# EAGLE board Controller Rev 2 (EAGLE 6.1)
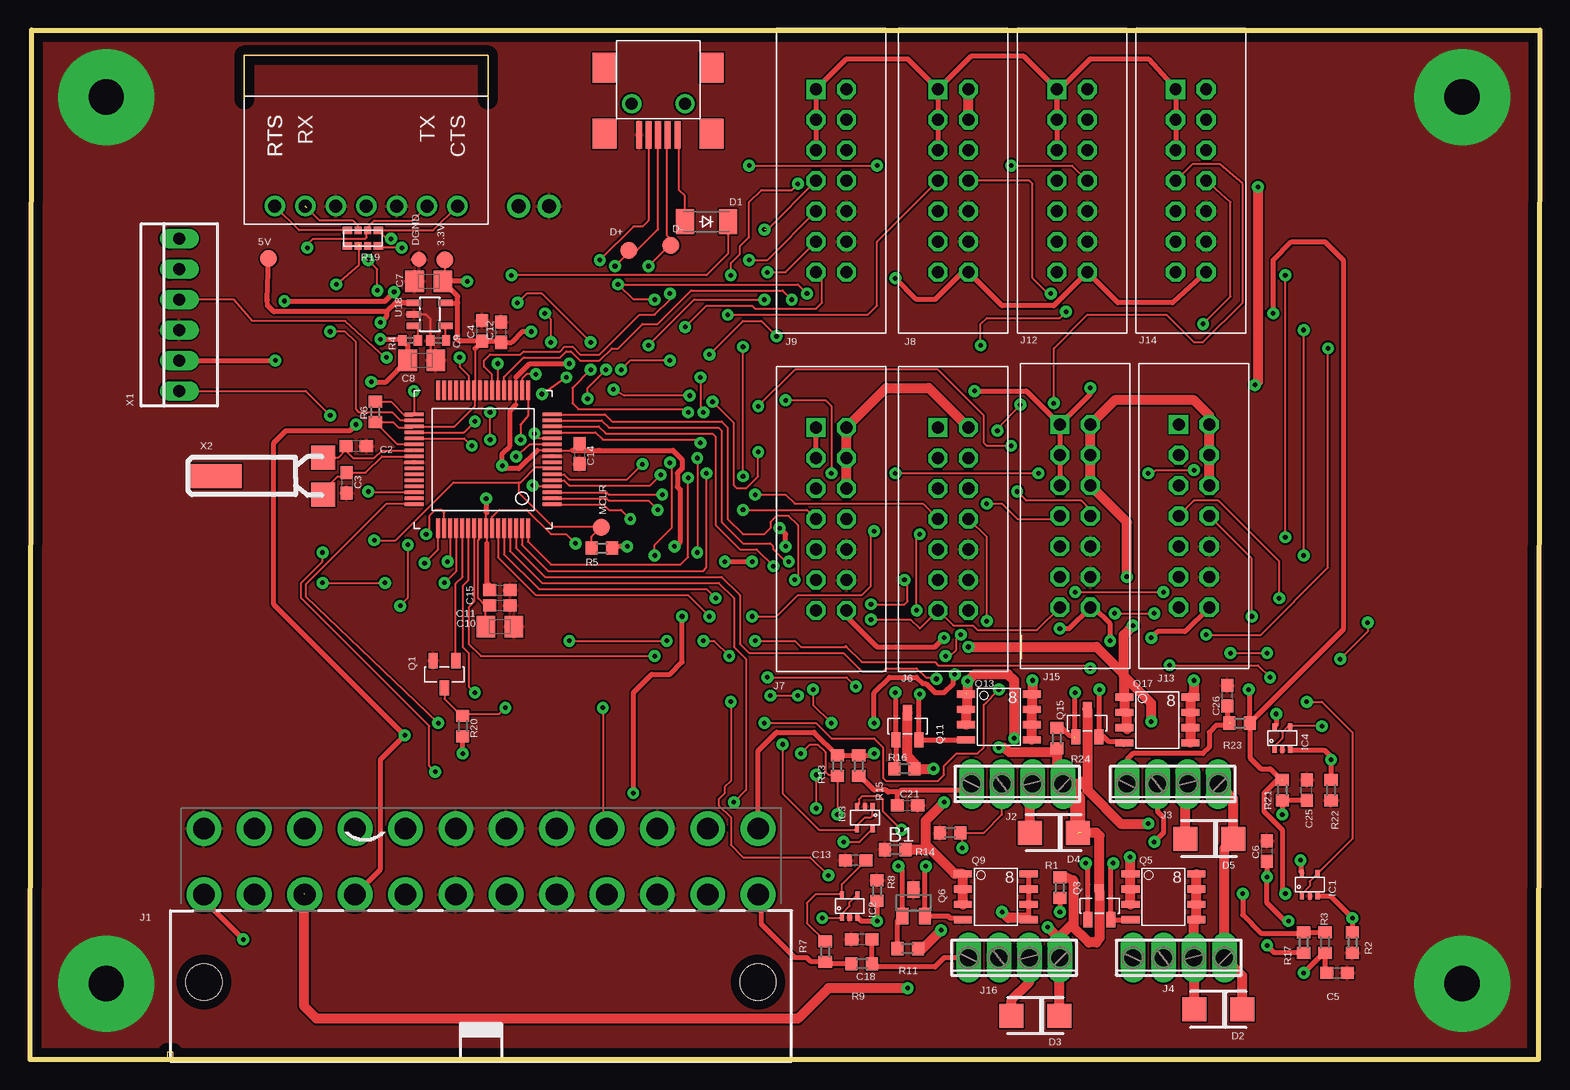
[diagram p0: board, top side]
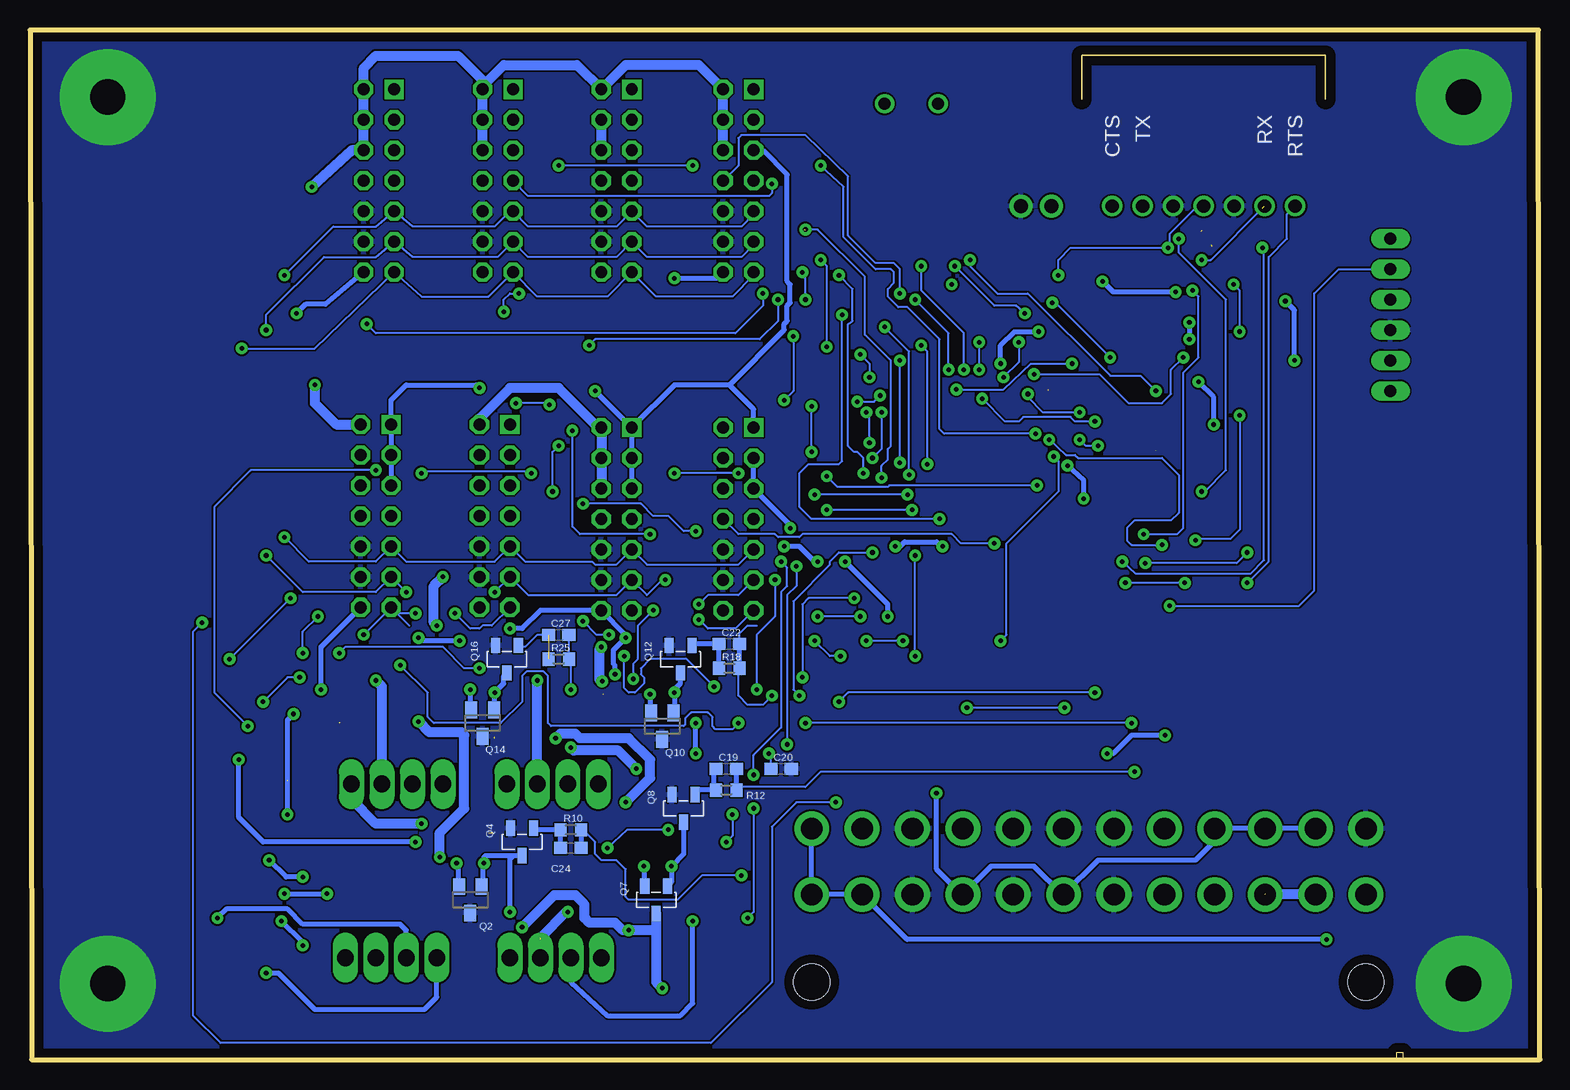
[diagram p1: board, bottom side, seen from below]

Size 125.86 x 85.85 mm. Coordinates in mm from the lower left corner, seen from the top.
Outline: 0,0 0.13,85.85 125.86,85.85 125.73,0 0,0
Copper layers (1*16): Top 0.035mm / dielectric 1.5mm / Bottom 0.035mm
Design rules: minimum track width 6mil, minimum drill 15mil, track to track 6mil, track to pad 6mil, pad to pad 6mil, via to via 6mil, smd to smd 6mil, copper to edge 30mil, drill to drill 6mil, minimum pad ring 12mil, minimum via ring 12mil, stop-mask expansion 4mil, vias tented up to drill 20mil, thermal gap 6mil

## Footprints (pad centres in the part's own frame; a part is rotated, then mirrored left to right if it is on the bottom)
TP14R = smd 1.4 x 1.4: TP 0,0
R0603 = smd 1 x 1.1: 1 -0.85,0; 2 0.85,0
C0603 = smd 1.1 x 1: 1 -0.85,0; 2 0.85,0
R/2012-12R = smd 1.55 x 1.8: + 1.175,0; - -1.175,0
C0402 = smd 0.7 x 0.9: 1 -0.65,0; 2 0.65,0
SOD-123_MINI-SMA = smd 1.5 x 2.1: A 1.8,0; C -1.8,0
DISCRETE_SMA = smd 2 x 2: A 2,0; C -2,0
B1,27 = smd 1.27 x 1.27: PP 0,0
MICROCHIP_SC70-5-LT = smd 0.35 x 0.55: 1 -0.65,-0.95; 2 0,-0.95; 3 0.65,-0.95; 4 0.65,0.95; 5 -0.65,0.95
ATX24_RIGHT_ANGLE = drill 1.8 pad 2.9: 1 23.1,4.76; 2 18.9,4.76; 3 14.7,4.76; 4 10.5,4.76; 5 6.3,4.76; 6 2.1,4.76; 7 -2.1,4.76; 8 -6.3,4.76; 9 -10.5,4.76; 10 -14.7,4.76; 11 -18.9,4.76; 12 -23.1,4.76; 13 23.1,10.26; 14 18.9,10.26; 15 14.7,10.26; 16 10.5,10.26; 17 6.3,10.26; 18 2.1,10.26; 19 -2.1,10.26; 20 -6.3,10.26; 21 -10.5,10.26; 22 -14.7,10.26; 23 -18.9,10.26; 24 -23.1,10.26 | hole 3: -23.1,-2.54; 23.1,-2.54
4POL254 = drill 1.4 long: 1 -3.81,0; 2 -1.27,0; 3 1.27,0; 4 3.81,0
SBH11-PBPC-D07-ST-BK = drill 0.991 square: 1 0,0 | drill 0.991 octagon: 2 2.54,0; 3 0,-2.54; 4 2.54,-2.54; 5 0,-5.08; 6 2.54,-5.08; 7 0,-7.62; 8 2.54,-7.62; 9 0,-10.16; 10 2.54,-10.16; 11 0,-12.7; 12 2.54,-12.7; 13 0,-15.24; 14 2.54,-15.24
WASP7PIN = drill 1.1: CTS 0,0; GND 5.08,0; GND1 10.16,0; RTS 15.24,0; RX 12.7,0; TX 2.54,0; VCC 7.62,0
DISCRETE_SOT23 = smd 0.762 x 1.27: 1 -0.953,-1.143; 2 0.953,-1.143; 3 0,1.143
SOT23 = smd 1 x 1.4: 1 -0.95,-1.1; 2 0.95,-1.1; 3 0,1.1
SO-8 = smd 1.524 x 0.61: 1 -2.743,1.905; 2 -2.743,0.635; 3 -2.743,-0.635; 4 -2.743,-1.905; 5 2.743,-1.905; 6 2.743,-0.635; 7 2.743,0.635; 8 2.743,1.905
R0402 = smd 0.7 x 0.9: 1 -0.65,0; 2 0.65,0
4PACK_0603 = smd 0.8 x 0.6: R1A -2.78,-0.6; R1B -2.78,-1.9; R4A -0.18,-0.6; R4B -0.18,-1.9 | smd 0.6 x 0.6: R2A -1.88,-0.6; R2B -1.88,-1.9; R3A -1.08,-0.6; R3B -1.08,-1.9
TQFP64-2 = smd 1.6 x 0.3: P$1 0,-2; P$2 0,-2.5; P$3 0,-3; P$4 0,-3.5; P$5 0,-4; P$6 0,-4.5; P$7 0,-5; P$8 0,-5.5; P$9 0,-6; P$10 0,-6.5; P$11 0,-7; P$12 0,-7.5; P$13 0,-8; P$14 0,-8.5; P$15 0,-9; P$16 0,-9.5; P$33 11.5,-9.5; P$34 11.5,-9; P$35 11.5,-8.5; P$36 11.5,-8; P$37 11.5,-7.5; P$38 11.5,-7; P$39 11.5,-6.5; P$40 11.5,-6; P$41 11.5,-5.5; P$42 11.5,-5; P$43 11.5,-4.5; P$44 11.5,-4; P$45 11.5,-3.5; P$46 11.5,-3; P$47 11.5,-2.5; P$48 11.5,-2 | smd 0.3 x 1.6: P$17 2,-11.5; P$18 2.5,-11.5; P$19 3,-11.5; P$20 3.5,-11.5; P$21 4,-11.5; P$22 4.5,-11.5; P$23 5,-11.5; P$24 5.5,-11.5; P$25 6,-11.5; P$26 6.5,-11.5; P$27 7,-11.5; P$28 7.5,-11.5; P$29 8,-11.5; P$30 8.5,-11.5; P$31 9,-11.5; P$32 9.5,-11.5; P$49 9.5,0; P$50 9,0; P$51 8.5,0; P$52 8,0; P$53 7.5,0; P$54 7,0; P$55 6.5,0; P$56 6,0; P$57 5.5,0; P$58 5,0; P$59 4.5,0; P$60 4,0; P$61 3.5,0; P$62 3,0; P$63 2.5,0; P$64 2,0
SOT23-5 = smd 0.55 x 1.2: 1 -0.95,-1.3; 2 0,-1.3; 3 0.95,-1.3; 4 0.95,1.3; 5 -0.95,1.3
1734035-1_1734035 = smd 2.3 x 0.5: 1 -1.15,1.6; 2 -1.15,0.8; 3 -1.15,0; 4 -1.15,-0.8; 5 -1.15,-1.6 | smd 2.5 x 2: P1 -6.75,4.45; P2 -1.25,4.45; P3 -1.25,-4.45; P4 -6.75,-4.45 | drill 1 pad 1.3: P$1 -3.75,-2.2; P$2 -3.75,2.25
2PTH = drill 1.168 pad 1.93: P$1 -2.54,0; P$2 0,0
22-23-2061 = drill 1 long: 1 -6.35,0; 2 -3.81,0; 3 -1.27,0; 4 1.27,0; 5 3.81,0; 6 6.35,0
CMR309T = smd 2 x 2: P$1 1,1.7; P$3 1,-1.4 | smd 4.5 x 2: P$4 -8.05,0.15

## Placement (x,y rotation side)
3.3V  PTR1TP14R  [TP14R]  34.57,66.7 90 top
5V  PTR1TP14R  [TP14R]  19.89,66.8 0 top
B1  FERRITE  [R0603]  72.14,17.53 0 top
C2  .1uF  [C0603]  27.19,51.17 0 top
C3  .1uF  [C0603]  26.41,48.09 270 top
C4  .1uF  [C0603]  37.7,60.77 90 top
C5  .1uF  [C0603]  108.97,7.24 0 top
C6  .1uF  [C0603]  103.12,17.4 90 top
C7  4.7uF  [R/2012-12R]  33.23,64.9 0 top
C8  4.7uF  [R/2012-12R]  32.66,58.31 180 top
C9  .1uF  [C0402]  34.04,59.98 180 top
C10  10uF  [R/2012-12R]  39.17,36.11 180 top
C11  .1uF  [C0603]  39.16,37.89 0 top
C12  .1uF  [C0603]  39.28,60.66 90 top
C13  .1uF  [C0603]  68.83,16.64 180 top
C14  .1uF  [C0603]  45.8,50.53 270 top
C15  .1uF  [C0603]  39.16,39.16 0 top
C18  .1uF  [C0603]  69.34,10.03 180 top
C19  .1uF  [C0603]  67.82,24.26 0 bottom
C20  .1uF  [C0603]  63.25,24.26 0 bottom
C21  .1uF  [C0603]  73.15,21.21 0 top
C22  .1uF  [C0603]  67.56,34.67 0 bottom
C24  .1uF  [C0603]  80.77,17.65 0 bottom
C25  .1uF  [C0603]  106.43,22.48 90 top
C26  .1uF  [C0603]  99.82,30.35 90 top
C27  .1uF  [C0603]  81.79,35.43 0 bottom
D1  CGRM4007-G  [SOD-123_MINI-SMA]  56.39,69.87 180 top
D2  DISCRETE_DIODESMA  [DISCRETE_SMA]  99.06,4.19 180 top
D3  DISCRETE_DIODESMA  [DISCRETE_SMA]  83.82,3.68 180 top
D4  DISCRETE_DIODESMA  [DISCRETE_SMA]  85.34,18.92 180 top
D5  DISCRETE_DIODESMA  [DISCRETE_SMA]  98.3,18.41 180 top
D+  PTR1TP14R  [TP14R]  49.93,67.49 0 top
D-  PTR1TP14R  [TP14R]  53.43,67.89 0 top
DGND  PTR1B1,27  [B1,27]  32.42,66.71 90 top
IC1  MICROCHIP_MCP6001-LT  [MICROCHIP_SC70-5-LT]  106.68,14.61 0 top
IC2  MICROCHIP_MCP6001-LT  [MICROCHIP_SC70-5-LT]  68.33,12.83 0 top
IC3  MICROCHIP_MCP6001-LT  [MICROCHIP_SC70-5-LT]  69.6,20.19 180 top
IC4  MICROCHIP_MCP6001-LT  [MICROCHIP_SC70-5-LT]  104.39,26.8 0 top
J1  ATX24RH  [ATX24_RIGHT_ANGLE]  37.59,9.02 0 top
J2  OSTVN04A150  [4POL254]  82.3,22.99 180 top
J3  OSTVN04A150  [4POL254]  95.25,22.99 180 top
J4  OSTVN04A150  [4POL254]  95.76,8.51 180 top
J6  SBH11-PBPC-D07-ST-BK  [SBH11-PBPC-D07-ST-BK]  75.69,52.7 0 top
J7  SBH11-PBPC-D07-ST-BK  [SBH11-PBPC-D07-ST-BK]  65.53,52.7 0 top
J8  SBH11-PBPC-D07-ST-BK  [SBH11-PBPC-D07-ST-BK]  75.69,80.9 0 top
J9  SBH11-PBPC-D07-ST-BK  [SBH11-PBPC-D07-ST-BK]  65.53,80.9 0 top
J10  WASP7PIN  [WASP7PIN]  35.64,71.17 180 top
J12  SBH11-PBPC-D07-ST-BK  [SBH11-PBPC-D07-ST-BK]  85.6,80.9 0 top
J13  SBH11-PBPC-D07-ST-BK  [SBH11-PBPC-D07-ST-BK]  95.76,52.96 0 top
J14  SBH11-PBPC-D07-ST-BK  [SBH11-PBPC-D07-ST-BK]  95.5,80.9 0 top
J15  SBH11-PBPC-D07-ST-BK  [SBH11-PBPC-D07-ST-BK]  85.85,52.96 0 top
J16  OSTVN04A150  [4POL254]  82.04,8.51 180 top
MCLR  PTR1TP14R  [TP14R]  47.62,44.41 90 top
Q1  DISCRETE_MMBT3904LT1G  [DISCRETE_SOT23]  34.54,32.13 180 top
Q2  [SOT23]  89.15,13.34 180 bottom
Q3  DISCRETE_MMBT3904LT1G  [DISCRETE_SOT23]  89.15,12.83 0 top
Q4  DISCRETE_MMBT3904LT1G  [DISCRETE_SOT23]  84.84,18.16 180 bottom
Q5  FDS8878  [SO-8]  94.49,13.59 0 top
Q6  [SOT23]  73.66,13.08 0 top
Q7  DISCRETE_MMBT3904LT1G  [DISCRETE_SOT23]  73.66,13.34 180 bottom
Q8  DISCRETE_MMBT3904LT1G  [DISCRETE_SOT23]  71.37,20.96 180 bottom
Q9  FDS8878  [SO-8]  80.52,13.59 0 top
Q10  [SOT23]  73.15,27.81 180 bottom
Q11  DISCRETE_MMBT3904LT1G  [DISCRETE_SOT23]  73.15,27.81 0 top
Q12  DISCRETE_MMBT3904LT1G  [DISCRETE_SOT23]  71.63,33.4 180 bottom
Q13  FDS8878  [SO-8]  80.77,28.57 0 top
Q14  [SOT23]  88.14,28.07 180 bottom
Q15  DISCRETE_MMBT3904LT1G  [DISCRETE_SOT23]  88.14,28.07 0 top
Q16  DISCRETE_MMBT3904LT1G  [DISCRETE_SOT23]  86.11,33.4 180 bottom
Q17  FDS8878  [SO-8]  93.98,28.32 0 top
R1  8.2k  [R0603]  85.85,14.35 90 top
R2  10k  [R0603]  110.24,9.78 90 top
R3  10  [R0603]  107.95,9.78 90 top
R4  10k  [R0402]  31.7,59.98 0 top
R5  10k  [R0603]  47.66,42.66 180 top
R6  10k  [R0603]  28.79,54.01 90 top
R7  10  [R0603]  66.29,9.02 270 top
R8  10k  [R0603]  70.61,14.1 270 top
R9  10  [R0603]  69.34,8 180 top
R10  4.7k  [R0603]  80.77,19.18 0 bottom
R11  8.2k  [R0603]  73.15,9.27 0 top
R12  4.7k  [R0603]  67.82,22.48 0 bottom
R13  10  [R0603]  67.31,24.51 90 top
R14  10k  [R0603]  76.71,18.92 0 top
R15  10  [R0603]  69.09,24.51 90 top
R16  8.2k  [R0603]  72.9,24.26 0 top
R17  10  [R0603]  106.17,9.78 90 top
R18  4.7k  [R0603]  67.56,32.64 0 bottom
R19  4PACK  [4PACK_0603]  29.22,69.75 0 top
R20  330  [R0603]  36.07,27.81 270 top
R21  10  [R0603]  104.39,22.48 90 top
R22  10k  [R0603]  108.46,22.48 90 top
R23  10  [R0603]  100.84,28.07 0 top
R24  8.2k  [R0603]  85.6,26.8 270 top
R25  4.7k  [R0603]  81.79,33.4 0 bottom
U3  PIC32-64TQFP64-2  [TQFP64-2]  43.52,44.3 180 top
U18  LDS3985XX33  [SOT23-5]  33.32,62.15 270 top
U25  1734035-1_USB  [1734035-1_1734035]  52.36,75.96 270 top
U$19  2P  [2PTH]  43.26,71.17 0 top
X1  [22-23-2061]  12.45,62.1 90 top
X2  CMR3XXT  [CMR309T]  23.43,48.52 0 top

## Library data of the parts
3.3V 5V D+ D- DGND MCLR = testpad
B1 C2-C15 C18-C22 C24-C27 R1-R18 R20-R25 = rcl
D1 = diode
D2-D5 IC1-IC4 Q1 Q3 Q4 Q7 Q8 Q11 Q12 Q15 Q16 = chipKIT_Max32
J1 = SparkFun-Connectors
J2-J4 J16 = con-OST-254
J6-J9 J12-J15 = SBH11-PBPC-D07-ST-BK
J10 = wasp7pin
Q2 Q6 Q10 Q14 = semicon-smd-ipc
Q5 Q9 Q13 Q17 = transistor-fet
R19 = ResistorBlocks
U3 = pic32
U18 = LDS3985XX33
U25 = YESIN_USB
U$19 = con_2h_70555-0001
X1 = con-molex; MF: MOLEX; MPN: 22-23-2061; OC_FARNELL: 1462922; OC_NEWARK: 27C1933
X2 = cmr3XXT

## Nets
5V: D1.C J10.VCC R19.R1B R19.R2B R19.R3B R19.R4B U3.P$34
5V_SERVO: J1.4 J1.6 J1.21 J1.22 J1.23 J6.1 J6.3 J6.5 J7.1 J7.3 J7.5 J8.1 J8.3 J8.5 J9.1 J9.3 J9.5 J12.1 J12.3 J12.5 J13.1 J13.3 J13.5 J14.1 J14.3 J14.5 J15.1 J15.3 J15.5
5V_STDBY: 5V.TP C8.+ J1.9 R4.1 R20.2 U18.1
12V_HEAT: D2.C D3.C D4.C D5.C J1.10 J1.11 J2.1 J3.1 J4.1 J16.1 Q3.3 Q7.3 Q11.3 Q15.3 R1.2 R11.2 R16.2 R24.2
12V_SW0: D2.A J4.2 Q5.5 Q5.6 Q5.7 Q5.8
12V_SW1: D3.A J16.2 Q9.5 Q9.6 Q9.7 Q9.8
12V_SW2: D4.A J2.2 Q13.5 Q13.6 Q13.7 Q13.8
12V_SW3: D5.A J3.2 Q17.5 Q17.6 Q17.7 Q17.8
+3V3: 3.3V.TP C4.1 C7.+ C12.1 C14.1 C15.1 R5.1 R6.1 U3.P$10 U3.P$19 U3.P$26 U3.P$35 U3.P$38 U3.P$57 U18.5 X1.2
D+: D+.TP U3.P$37 U25.3
D-: D-.TP U3.P$36 U25.2
DGND: B1.1 C2.2 C3.2 C4.2 C5.2 C6.2 C7.- C8.- C9.2 C10.- C11.2 C12.2 C13.2 C14.2 C15.2 C18.2 C20.2 C21.2 C25.2 C26.2 DGND.PP IC1.2 IC2.2 IC3.2 IC4.2 J1.3 J1.5 J1.7 J1.15 J1.17 J1.18 J1.19 J1.24 J6.10 J6.12 J7.10 J7.12 J8.10 J8.12 J9.10 J9.12 J10.GND J10.GND1 J12.10 J12.12 J13.10 J13.12 J14.10 J14.12 J15.10 J15.12 Q1.2 Q2.3 Q4.2 Q6.3 Q8.2 Q10.3 Q12.2 Q14.3 Q16.2 R2.1 R8.1 R14.1 R22.1 U3.P$9 U3.P$20 U3.P$25 U3.P$41 U18.2 U25.5 U$19.P$2 X1.3
ENC0_CSN: J6.7 U3.P$3
ENC1_CSN: J7.7 U3.P$2
ENC2_CSN: J8.7 U3.P$1
ENC3_CSN: J9.7 U3.P$64
ENC4_CSN: J12.7 U3.P$63
ENC5_CSN: J13.7 U3.P$61
ENC6_CSN: J14.7 U3.P$62
ENC7_CSN: J15.7 U3.P$59
ENC_3_3V: J1.1 J1.2 J1.12 J1.13 J6.14 J7.14 J8.14 J9.14 J12.14 J13.14 J14.14 J15.14 R3.2 R7.2 R9.2 R13.2 R15.2 R17.2 R21.2 R23.2
ENC_MISO: J6.13 J7.13 J8.13 J9.13 J12.13 J13.13 J14.13 J15.13 U3.P$5
ENC_MOSI: J6.11 J7.11 J8.11 J9.11 J12.11 J13.11 J14.11 J15.11 U3.P$6
ENC_SCK: J6.9 J7.9 J8.9 J9.9 J12.9 J13.9 J14.9 J15.9 U3.P$4
GND: B1.2 J6.2 J6.4 J6.6 J7.2 J7.4 J7.6 J8.2 J8.4 J8.6 J9.2 J9.4 J9.6 J12.2 J12.4 J12.6 J13.2 J13.4 J13.6 J14.2 J14.4 J14.6 J15.2 J15.4 J15.6 Q5.1 Q5.2 Q5.3 Q9.1 Q9.2 Q9.3 Q13.1 Q13.2 Q13.3 Q17.1 Q17.2 Q17.3
HEAT0: IC1.1 IC1.4 U3.P$16
HEAT0_ON: C24.2 R10.2 U3.P$54
HEAT1: IC2.1 IC2.4 U3.P$15
HEAT1_ON: C19.2 R12.2 U3.P$49
HEAT2: IC3.1 IC3.4 U3.P$14
HEAT2_ON: C22.2 R18.2 U3.P$27
HEAT3: IC4.1 IC4.4 U3.P$13
HEAT3_ON: C27.2 R25.2 U3.P$48
MCLRN: MCLR.TP R5.2 U3.P$7 X1.1
N$1: C5.1 J4.4 R3.1
N$2: R4.2 U18.3
N$3: C9.1 U18.4
N$4: C3.1 U3.P$40 X2.P$3
N$5: C10.+ C11.1 U3.P$56
N$6: C2.1 U3.P$39 X2.P$1
N$7: IC2.3 J16.3 R8.2
N$8: C13.1 IC2.5 R7.1
N$9: C18.1 J16.4 R9.1
N$10: IC1.3 J4.3 R2.2
N$11: Q6.1 Q7.1 Q8.3 R11.1
N$12: C19.1 Q8.1 R12.1
N$13: Q2.1 Q3.1 Q4.3 R1.1
N$14: C24.1 Q4.1 R10.1
N$15: Q6.2 Q7.2 Q9.4
N$16: Q2.2 Q3.2 Q5.4
N$17: IC3.3 J2.3 R14.2
N$18: C20.1 IC3.5 R13.1
N$19: C21.1 J2.4 R15.1
N$20: Q10.1 Q11.1 Q12.3 R16.1
N$21: C6.1 IC1.5 R17.1
N$22: C22.1 Q12.1 R18.1
N$23: Q10.2 Q11.2 Q13.4
N$24: IC4.3 J3.3 R22.2
N$25: C25.1 IC4.5 R21.1
N$26: C26.1 J3.4 R23.1
N$27: Q14.1 Q15.1 Q16.3 R24.1
N$28: C27.1 Q16.1 R25.1
N$29: Q14.2 Q15.2 Q17.4
N$32: J1.16 Q1.3 R20.1
PGC: U3.P$17 X1.5
PGD: U3.P$18 X1.4
PS_ON: Q1.1 U3.P$53
SERVO0: J6.8 U3.P$60
SERVO1: J7.8 U3.P$58
SERVO2: J8.8 U3.P$21
SERVO3: J9.8 U3.P$23
SERVO4: J12.8 U3.P$12
SERVO5: J13.8 U3.P$11
SERVO6: J14.8 U3.P$55
SERVO7: J15.8 U3.P$22
U1CTS: J10.CTS R19.R4A U3.P$46
U1RTS: J10.RTS R19.R1A U3.P$52
U1RX: J10.RX R19.R2A U3.P$50
U1TX: J10.TX R19.R3A U3.P$51
USBID: R6.2 U3.P$33 U25.4
VBUS: D1.A U25.1
VDD: U$19.P$1

## Tracks (layer width: path | path; a pad name or v marks a point on that pad's centre or on a via)
5V  (via drill 0.38)  (1 unrouted)
  Top 0.152: v30.99,67.69 29.2,67.69 R19.R4B R19.R3B R19.R2B R19.R1B | D1.C 58.19,67.21 56.39,65.41 v40.13,65.41 | U3.P$34 30.9,53.3 30.23,53.98 27.43,53.98 27.18,54.23 27.18,59.82 26.29,60.71 v25.02,60.71 | v25.53,64.64 27.43,66.29 27.43,67.95
  Bottom 0.152: J10.VCC 28.52,71.17 30.86,68.83 30.86,67.82 v30.99,67.69 39.12,67.69 40.13,66.67 v40.13,65.41 | v25.02,60.71 25.02,64.13 v25.53,64.64
5V_SERVO  (via drill 0.38)
  Top 0.406: J9.5 J9.3 J9.1 68.07,83.44 73.15,83.44 J8.1 | J8.1 78.49,83.69 82.8,83.69 J12.1 J12.3 | J12.3 J12.5 | J12.3 85.6,80.64 88.39,83.44 93.22,83.44 J14.1 J14.3 J14.5 | J8.1 J8.3 J8.5 | v78.74,55.75 83.06,55.75 J15.1 | J15.1 J15.3 J15.5 | v88.39,56.01 88.39,55.5 J15.1 | v50.29,22.23 50.29,30.61 51.82,32.13 53.34,32.13 54.36,33.15 v54.36,36.96 | v57.91,41.53 v60.2,41.53 | v62.99,42.8 62.99,43.81 v62.48,44.32 | J7.3 J7.1
  Bottom 0.406: J7.3 J7.5 62.48,44.58 v62.48,44.32 | J7.1 65.53,54.23 67.56,56.26 | 67.56,56.26 72.14,56.26 J6.1 | J6.1 J6.3 J6.5 | J6.1 v78.74,55.75 | v88.39,56.01 88.65,56.26 94.49,56.26 95.76,54.99 J13.1 J13.3 J13.5 | J9.5 64.77,75.82 62.74,73.79 62.74,64.9 62.48,64.64 62.48,63.12 62.74,62.87 62.74,61.59 62.99,61.34 62.99,60.83 67.56,56.26 | v50.29,22.23 50.29,15.88 48.19,13.78 J1.4 45.74,16.13 42.16,16.13 39.81,13.78 J1.6 36.83,16.64 28.7,16.64 27.09,18.25 J1.21 J1.22 J1.23 | v54.36,36.96 54.36,37.97 v57.91,41.53 | v60.2,41.53 60.45,41.53 61.72,42.8 v62.99,42.8
5V_STDBY  (via drill 0.38)
  Top 0.152: 31.75,63.12 32,63.12 | R4.1 31.05,60.01 30.99,60.07
  Top 0.406: U18.1 30.46,63.1 | 30.46,63.1 29.72,62.36 | 29.72,62.36 20.32,62.36 19.81,62.87 19.78,63.35 5V.TP | R4.1 31.48,59.55 C8.+ 29.68,56.52 v28.45,56.52 | v29.21,60.07 30.99,60.07 | J1.9 27.11,13.78 29.21,15.88 29.21,25.02 v31.24,27.05 20.32,37.97 20.32,51.44 21.34,52.45 26.67,52.45 v27.18,52.96 | v36.07,25.53 R20.2 | 32,63.12 30.48,63.12 30.46,63.1 | 29.72,62.36 29.72,61.98 v29.21,61.47
  Bottom 0.406: v29.21,61.47 v29.21,60.07 | v31.24,27.05 34.04,27.05 35.56,25.53 v36.07,25.53 | v27.18,52.96 27.18,55.24 v28.45,56.52
12V_HEAT  (via drill 0.38)  (3 unrouted)
  Top 0.406: 85.73,10.16 85.85,10.03 | 86.96,11.02 86.87,11.3 | 85.82,8.48 J16.1 | R11.2 74.42,9.27 | 87.63,18.92 87.38,18.67 | R1.2 86.42,15.2 | 87,18.54 87.38,18.92
  Top 0.813: Q15.3 88.14,23.5 | 88.14,23.5 87.63,22.99 J2.1 85.6,23.5 R24.2 85.18,25.65 81.66,25.65 81.15,26.04 v80.77,26.04 | Q11.3 73.15,25.27 73.75,24.68 R16.2 v75.31,24.26 | v84.84,11.05 85.73,10.16 86.87,11.3 86.87,11.18 88.27,9.78 88.9,9.78 89.15,10.16 Q3.3 89.15,18.67 88.9,18.92 87.63,18.92 | 85.85,10.03 J16.1 | 86.96,11.02 86.96,14.99 86.42,15.2 | D3.C 85.82,8.48 | 74.42,9.27 v75.95,10.8 | J3.1 100.3,21.75 D5.C 99.57,17.69 J4.1 101.06,7.02 D2.C | 88.14,23.5 88.14,22.48 90.93,19.69 v93.22,19.69 | v73.15,5.97 66.55,5.97 64.01,3.43 23.88,3.43 22.86,4.45 22.86,13.84
  Top 1.27: D4.C 87.34,21.75 J2.1
  Bottom 0.406: Q7.3 73.66,11.05 73.91,10.8 | v75.95,10.8 76.45,10.8
  Bottom 0.813: v75.31,24.26 76.84,25.78 80.52,25.78 v80.77,26.04 | 73.91,10.8 v75.95,10.8 | v93.22,19.69 97.03,19.69 99.06,21.72 J3.1 | Q7.3 73.66,6.48 v73.15,5.97 | J1.11 J1.10 | 76.45,10.8 77.09,11.43 79.25,11.43 79.63,11.81 79.63,12.95 80.39,13.72 82.17,13.72 v84.84,11.05
12V_SW0
  Top 0.406: 97.06,8.48 J4.2
  Top 0.813: J4.2 97.03,11.48 Q5.5 Q5.6 Q5.7 Q5.8 | D2.A 97.06,8.48
12V_SW1  (via drill 0.38)  (1 unrouted)
  Top 0.406: 83.13,11.81 Q9.5 Q9.6 Q9.7 Q9.8
  Top 0.813: D3.A 81.82,4.98 83.31,6.48 J16.2 | 83.13,11.81 81.53,11.81 v81.03,12.32
  Bottom 0.813: J16.2 83.31,10.03 | v81.03,12.32 81.15,12.32 83.31,10.16
12V_SW2  (via drill 0.38)
  Top 0.406: 83.57,30.28 Q13.8
  Top 0.813: D4.A 83.34,22.77 J2.2 | v83.57,31.62 83.57,30.28 | Q13.8 Q13.7 Q13.6 Q13.5
  Bottom 0.813: J2.2 v83.57,31.62
12V_SW3  (via drill 0.38)
  Top 0.813: D5.A 96.3,22.77 J3.2 | v97.03,31.62 97.03,30.53 Q17.8 Q17.7 Q17.6 Q17.5
  Bottom 0.813: J3.2 96.52,31.12 v97.03,31.62
+3V3  (via drill 0.38)
  Top 0.152: 35.64,63.1 35.66,63.12 | 3.3V.TP 34.57,64.92 34.54,64.9 | 34.29,64.64 34.54,64.9 | 34.54,64.9 34.54,64.64 | 34.54,64.9 C7.+ | C4.1 37.69,59.92 | 37.08,59.31 37.08,55.74 | 39.17,59.92 C12.1 | 35.71,59.92 35.56,60.07 | 35.66,60.43 35.56,60.33 | C14.1 45.22,50.8 U3.P$10 42.3,50.8 | U3.P$38 30.65,51.3 R6.1 30.28,53.16 30.73,52.7 31.92,52.7 U3.P$35 35.41,52.8 37.08,54.48 37.08,55.74 | 48.65,42.8 R5.1 | 37.08,55.74 U3.P$26 | 40.51,54.61 40.51,55.88 | 40.51,55.88 40.51,56.9 | U3.P$19 40.52,55.87 40.51,55.88 | 38.1,43.05 38.1,44.23 U3.P$57 38.02,45.51 38.1,45.59
  Top 0.406: C7.+ 35.66,63.65 35.66,63.12 35.66,60.43 | U18.5 35.64,63.1 | 37.69,59.92 37.08,59.31 | C12.1 40.14,59.81 41.02,60.69 v41.78,60.71 | 39.17,59.92 C4.1 35.71,59.92 | 35.56,60.07 35.56,60.33 | 42.3,50.8 40.77,49.28 39.62,49.28 v39.37,49.53 39.37,50.55 40.01,51.18 40.01,54.1 40.51,54.61 | C15.1 38.31,39.54 38.1,39.75 38.1,43.05 | 45.22,50.8 47.37,50.8 47.5,50.8 53.59,50.8 54.36,50.04 54.36,49.28 53.98,48.9 53.98,47.75 54.23,47.5 54.23,43.18 53.85,42.8 v53.72,42.8 | v49.78,42.8 48.65,42.8 | v44.96,58.04 41.66,58.04 40.51,56.9 | X1.2 v20.45,58.29 | v21.21,63.25 29.59,63.25 v30.35,64.01 | v36.45,64.9 C7.+ | v38.02,46.78 38.02,45.67 38.1,45.59
  Bottom 0.406: v53.72,42.8 53.34,42.8 52.96,43.18 50.29,43.18 49.91,42.8 v49.78,42.8 | v38.02,46.78 38.02,48.31 v39.37,49.53 | v44.96,58.04 44.96,59.56 43.81,60.71 v41.78,60.71 | v20.45,58.29 20.45,62.48 v21.21,63.25 | v30.35,64.01 35.56,64.01 v36.45,64.9
D+  (via drill 0.38)
  Top 0.152: v48.77,66.17 49.93,67.33 D+.TP 50.6,67.49 52.32,69.22 52.36,69.22 U25.3 | U3.P$37 36.21,51.8 v36.83,51.18 | v42.67,55.5 v44.7,56.9 | v43.43,59.82 43.43,61.72 v42.93,62.23 | v38.35,51.69 v38.35,53.98
  Bottom 0.152: 48.51,66.17 v48.77,66.17 45.47,62.87 43.69,62.87 v42.93,62.23 | v38.35,53.98 41.4,53.98 42.67,55.24 v42.67,55.5 | v36.83,51.18 37.85,51.18 v38.35,51.69 | v43.43,59.82 43.43,58.17 v44.7,56.9
D-  (via drill 0.38)
  Top 0.152: v51.56,66.17 53.29,67.89 D-.TP 53.43,68.36 53.09,68.71 53.09,77.04 U25.2 | U3.P$36 36.18,52.3 v37.08,53.21 | v46.48,55.12 46.48,56.01 v48.01,57.53
  Bottom 0.152: 51.56,65.91 v51.56,66.17 51.56,64.13 48.01,60.58 v48.01,57.53 | v37.08,53.21 38.73,53.21 39.12,53.59 43.05,53.59 43.43,53.21 44.58,53.21 v46.48,55.12
DGND  (via drill 2.95 pad 8)
  Top 0.152: U18.2 32.06,62.1 33.02,62.1 33.39,61.73 C9.2 33.39,58.75 33.53,58.62 33.53,58.42 | C8.- 33.63,58.31 33.53,58.42 | 33.53,58.42 33.66,58.42 33.78,58.29
  other vias: 6.35,80.26 119.38,80.26 119.38,6.35 6.35,6.35
  pour Top: 0.38,85.98 125.73,85.6 125.6,0.64 0.25,1.02
  pour Bottom: -0.25,85.98 125.48,85.72 125.86,0.13 0.13,0.38
ENC0_CSN  (via drill 0.38)
  Top 0.152: U3.P$3 48.07,47.3 48.26,47.12 v52.7,47.12 | v60.45,47.12 62.99,47.12 63.75,46.36 74.42,46.36 J6.7
  Bottom 0.152: v52.7,47.12 v60.45,47.12
ENC1_CSN  (via drill 0.38)
  Top 0.152: U3.P$2 48.06,46.8 48.26,46.61 51.56,46.61 v52.32,45.85 | v59.44,45.85 64.77,45.85 J7.7
  Bottom 0.152: 65.28,45.34 J7.7 | v52.32,45.85 v59.44,45.85
ENC2_CSN  (via drill 0.38)
  Top 0.152: v58.17,62.1 69.85,62.1 70.61,62.87 70.61,68.2 J8.7 | U3.P$1 47.8,46.3 48.26,45.85 49.28,45.85 v50.04,45.09
  Bottom 0.152: v50.04,45.09 60.71,45.09 61.72,46.1 61.72,48.9 60.96,49.66 58.42,49.66 58.17,49.91 v58.17,62.1
ENC3_CSN  (via drill 0.38)  (1 unrouted)
  Top 0.152: U3.P$64 41.52,43.19 43.43,41.27 54.23,41.27 54.86,41.91 v54.86,48.51 | v61.21,69.22 61.47,69.22 J9.7
  Bottom 0.152: v54.86,48.51 54.86,49.53 54.36,50.04 54.36,50.93 54.1,51.18 54.1,58.29 56.26,60.45 56.26,65.28 60.2,69.22 61.34,69.22
ENC4_CSN  (via drill 0.38)
  Top 0.152: U3.P$63 41.02,42.93 43.18,40.77 56.13,40.77 56.39,41.02 v56.39,48.9 | v58.42,65.41 58.42,66.42 59.18,67.18 59.18,67.82 59.94,68.58 59.94,71.5 60.96,72.52 63.5,72.52 v64.01,73.03
  Bottom 0.152: v56.39,48.9 56.39,50.16 56.9,50.67 57.15,50.67 57.66,51.18 57.66,61.34 57.28,61.59 57.28,64.26 v58.42,65.41 | v64.01,73.03 64.01,72.26 64.26,72.01 84.33,72.01 J12.7
ENC5_CSN  (via drill 0.38)
  Top 0.152: U3.P$61 40.02,42.4 42.67,39.75 57.4,39.75 58.67,38.48 58.67,34.42 59.69,33.4 59.69,22.48 v58.67,21.46 | v111.51,36.45 111.51,35.69 v109.22,33.4 | v104.14,38.48 104.14,41.53 99.06,46.61 97.03,46.61 J13.7
  Bottom 0.152: v58.67,21.46 61.98,21.46 64.01,19.43 64.01,6.48 69.09,1.4 109.98,1.4 112.27,3.68 112.27,35.69 v111.51,36.45 | v109.22,33.4 v104.14,38.48
ENC6_CSN  (via drill 0.38)
  Top 0.152: U3.P$62 40.52,42.66 42.93,40.26 57.66,40.26 59.18,38.73 59.18,34.67 59.94,33.91 67.82,33.91 69.34,32.38 71.12,32.38 71.37,32.64 73.91,32.64 74.68,31.88 75.44,31.88 v75.57,31.75 | v73.91,37.47 73.91,43.56 v74.17,43.81 | v85.34,54.74 85.34,59.31 88.14,62.1 94.74,62.1 97.03,59.82 97.79,59.82 101.09,63.12 101.09,73.03 99.19,74.68 96.9,74.68 J14.7 | v80.65,52.45 80.65,52.58 v82.55,54.61
  Bottom 0.152: v75.57,31.75 75.57,33.02 75.18,33.4 75.18,36.2 v73.91,37.47 | v74.17,43.81 80.01,43.81 80.65,44.45 v80.65,52.45 | v82.55,54.61 82.68,54.74 v85.34,54.74
ENC7_CSN  (via drill 0.38)
  Top 0.152: U3.P$59 39.02,41.88 42.16,38.73 54.86,38.73 v56.64,36.96 | v60.2,36.96 62.23,36.96 64.01,38.73 69.34,38.73 70.1,39.5 70.1,43.81 v70.36,44.07 | v79.76,46.36 81.03,46.36 82.3,45.09 85.6,45.09 J15.7
  Bottom 0.152: v56.64,36.96 v60.2,36.96 | v70.36,44.07 71.37,44.07 72.64,45.34 73.91,45.34 74.93,46.36 v79.76,46.36
ENC_3_3V  (via drill 0.38)  (1 unrouted)
  Top 0.406: 104.39,23.24 103.38,24.26 102.62,24.26 101.69,25.19 R23.2 | R3.2 R17.2 106.08,10.54 102.62,10.54 101.09,12.07 v101.09,13.84 | R3.2 108.12,10.63 108.2,10.54 107.95,10.54 R3.2 | J7.14 68.07,36.96 70.61,34.42 75.44,34.42 v76.2,35.18 | v85.85,35.94 86.61,35.94 J15.14 88.65,37.72 90.04,36.32 v90.04,34.93 | J13.14 96.27,35.69 93.98,35.69 v93.47,35.18 | R23.2 101.69,30.77 v101.6,30.86 | v103.63,62.23 103.63,66.67 105.16,68.2 107.95,68.2 109.47,66.67 109.47,35.85 R23.2 | J14.14 95.25,63.12 90.68,63.12 J12.14 85.34,62.87 81.03,62.87 J8.14 77.72,65.66 75.44,63.37 73.91,63.37 v72.14,65.15 | R21.2 103.97,23.33 102.87,22.23 102.87,20.7 104.39,19.18 104.39,14.1 v104.65,13.84 | R9.2 66.46,8 R7.2 65.11,8.17 64.77,8.51 63.75,8.51 60.96,11.3 60.96,13.51 J1.1 | v70.36,25.53 70.19,25.36 R15.2 R13.2 65.37,27.3 62.23,27.3 60.69,25.77 J1.13 | v70.36,28.07 70.36,30.61 71.63,31.88 73.91,31.88 74.42,31.37 74.68,31.37 75.44,30.61 76.2,30.61 76.96,31.37 76.96,32 v77.09,32.13 | J1.12 14.49,13.32 v17.78,10.03
  Bottom 0.152: v76.2,35.18 76.2,35.43
  Bottom 0.406: 76.2,35.43 J6.14 83.31,37.47 84.84,35.94 v85.85,35.94 | v101.6,30.86 101.6,34.42 J13.14 | J14.14 101.22,62.99 102.87,62.99 v103.63,62.23 | v72.14,65.15 68.58,65.15 J9.14 | v104.65,13.84 v101.09,13.84 | v90.04,34.93 93.22,34.93 v93.47,35.18 | v70.36,25.53 v70.36,28.07 | v77.09,32.13 77.09,32.89 77.22,33.02 77.22,34.16 v76.2,35.18 | J1.13 J1.1 J1.2 52.75,10.03 v17.78,10.03
ENC_MISO  (via drill 0.38)
  Top 0.152: v98.04,35.43 102.62,35.43 108.2,41.02 v108.2,59.31 | J15.13 83.95,35.81 78.99,35.81 78.61,36.2 76.96,36.2 J6.13 74.17,35.94 73.41,36.7 v70.1,36.7 | U3.P$5 44.53,48.3 44.96,47.88 51.69,47.88 v52.58,48.77 | v54.61,61.09 56.39,62.87 60.2,62.87 60.45,62.61 65.53,62.61 66.04,63.12 66.04,65.15 J9.13 | v90.42,37.21 v93.73,37.21
  Bottom 0.152: J9.13 65.53,65.41 67.31,63.63 73.66,63.63 J8.13 77.72,63.63 83.57,63.63 J12.13 87.63,63.63 93.22,63.63 J14.13 102.11,59.31 v108.2,59.31 | J13.13 v98.04,35.43 | J15.13 87.38,36.2 88.14,36.2 88.39,35.94 89.15,35.94 v90.42,37.21 | 94.23,36.2 J13.13 | J7.13 67.06,35.94 69.34,35.94 v70.1,36.7 | v52.58,48.77 52.58,59.05 v54.61,61.09 | v93.73,37.21 95.25,37.21 J13.13
ENC_MOSI  (via drill 0.38)
  Top 0.152: v106.17,42.04 v106.17,60.83 | U3.P$6 44.54,48.8 44.96,48.39 49.78,48.39 v51.05,49.66 | v51.56,59.56 55.37,63.37 v61.21,63.37 | v61.47,65.66 62.99,65.66 J9.11 | v87.12,38.99 v94.49,38.99 | v70.1,37.97 72.9,37.97 73.15,38.23 73.15,39.75 v72.9,40.01
  Bottom 0.152: J9.11 65.53,67.95 66.55,66.93 74.42,66.93 J8.11 76.96,66.93 84.33,66.93 J12.11 86.87,66.93 93.98,66.93 J14.11 97.03,66.93 101.35,66.93 106.17,62.1 v106.17,60.83 | v106.17,42.04 103.12,38.99 97.03,38.99 J13.11 v94.49,38.99 | v87.12,38.99 J15.11 84.33,38.73 76.96,38.73 J6.11 74.42,38.73 73.15,40.01 v72.9,40.01 | J7.11 66.8,38.73 69.34,38.73 v70.1,37.97 | v51.05,49.66 51.05,59.05 v51.56,59.56 | v61.21,63.37 61.21,65.41 v61.47,65.66
ENC_SCK  (via drill 0.38)
  Top 0.152: v104.65,43.56 v104.65,65.41 | U3.P$4 41.98,47.8 v41.91,47.88 | v59.44,48.64 v59.44,59.44 | v59.94,66.67 61.47,66.67 J9.9
  Bottom 0.152: J9.9 65.53,70.48 66.55,69.47 74.42,69.47 J8.9 76.96,69.47 84.33,69.47 J12.9 85.85,70.74 87.12,69.47 93.98,69.47 J14.9 97.03,69.47 100.58,69.47 v104.65,65.41 | v104.65,43.56 102.62,41.53 97.03,41.53 J13.9 94.49,41.53 87.12,41.53 J15.9 84.58,41.53 78.99,41.53 78.74,41.27 76.96,41.27 J6.9 74.42,41.27 66.8,41.27 J7.9 | v59.44,48.64 58.55,47.75 54.36,47.75 54.23,47.88 v41.91,47.88 | v59.44,59.44 59.44,66.17 v59.94,66.67
GND  (via drill 0.38)  (1 unrouted)
  Top 0.406: 91.75,16.84 v91.69,16.89 | 91.19,30.28 Q17.1 | Q17.3 91.31,27.69 91.44,27.56 | 91.44,28.75 Q17.2 | 91.19,32 91.19,32.13
  Top 0.813: Q5.3 Q5.2 Q5.1 91.75,16.84 | 91.19,30.28 91.19,32 93.47,29.72 v93.47,28.19 | Q17.1 Q17.2 | 91.44,27.56 91.44,28.75 | J6.2 74.93,56.01 71.37,56.01 J7.2 J7.4 J7.6 | v102.36,72.77 102.36,56.52 v102.11,56.26 | J13.6 J13.4 J13.2 98.3,53.72 97.03,54.99 90.42,54.99 J15.2 J15.4 J15.6 91.44,44.83 v91.44,40.26 | v78.23,34.42 88.9,34.42 91.19,32.13 91.19,35.43 v91.95,36.2 | Q9.3 Q9.2 Q9.1 77.09,15.49 74.68,17.91 | 74.68,17.91 74.68,19.94 v76.2,21.46 | v82.04,26.8 82.04,31.62 81.53,32.13 78.74,32.13 v78.16,31.55 78.16,30.53 78.11,30.48 78.11,29.29 Q13.2 Q13.3 | B1.2 74.68,17.53 74.68,17.91 | J8.4 J8.2
  Bottom 0.406: J6.2 78.49,52.7 | J12.2 J12.4 J12.6 | v91.95,36.2 92.2,36.45 | 78.36,34.29 v78.23,34.42
  Bottom 0.813: v91.69,16.89 91.69,18.92 89.66,20.96 89.66,27.05 89.92,27.3 92.58,27.3 v93.47,28.19 | 78.49,52.7 81.79,56.01 85.85,56.01 88.39,53.47 J15.2 | J6.2 J6.4 J6.6 | v102.36,72.77 99.06,75.82 J14.6 J14.4 J14.2 98.04,82.68 97.03,83.69 90.17,83.69 88.14,81.66 J12.2 | v102.11,56.26 102.11,54.74 100.33,52.96 J13.2 | J8.6 J8.4 | J9.6 J9.4 J9.2 70.1,82.93 76.2,82.93 J8.2 80.26,82.93 86.36,82.93 88.14,81.15 J12.6 | 92.2,36.45 92.2,39.5 v91.44,40.26 | v76.2,21.46 74.17,23.5 74.17,25.02 75.95,26.8 80.01,26.8 80.39,27.18 81.66,27.18 v82.04,26.8 | v78.16,31.55 78.36,31.62 78.36,34.29
HEAT0  (via drill 0.38)
  Top 0.152: v65.28,30.86 65.28,29.59 v66.8,28.07 | v95,32.89 102.36,32.89 v103.38,31.88 | v106.43,29.85 107.7,29.85 110.24,27.3 110.24,18.41 107.33,15.51 | 107.33,15.51 106.68,14.86 106.68,14.48 106.05,13.84 106.05,13.59 106.03,13.6 IC1.1 | U3.P$16 47.92,53.8 48.51,53.21 57.66,53.21 58.17,52.7 58.17,45.09 59.44,43.81 61.21,43.81 61.72,44.32 61.72,44.83 62.23,45.34 63.25,45.34 64.01,44.58 64.01,40.26 v63.75,40.01 | IC1.4 107.33,15.51
  Bottom 0.152: v65.28,30.86 65.28,35.43 63.75,36.96 v63.75,40.01 | v66.8,28.07 67.31,27.56 68.71,27.56 68.96,27.81 68.96,28.57 69.34,28.96 70.74,28.96 71.25,28.45 71.25,27.94 71.37,27.81 82.42,27.81 82.68,28.07 82.68,32 83.06,32.38 84.45,32.38 84.84,32 84.84,29.85 86.61,28.07 92.2,28.07 92.71,28.57 92.71,30.61 v95,32.89 | v103.38,31.88 104.39,31.88 v106.43,29.85
HEAT0_ON  (via drill 0.38)
  Top 0.152: U3.P$54 36.52,39.95 36.07,39.5 36.07,34.42 36.58,33.91 36.58,31.12 v37.08,30.61 | v58.42,29.85 58.42,23.24 57.91,22.73 57.91,22.23 57.4,21.72 57.4,21.21 58.42,20.19 58.42,17.91 59.44,16.89 65.02,16.89 v66.55,15.37
  Bottom 0.152: v37.08,30.61 57.66,30.61 v58.42,29.85 | R10.2 79.76,19.18 78.74,18.16 78.74,17.14 78.23,16.64 76.96,16.64 76.2,15.88 76.2,13.59 75.95,13.34 71.88,13.34 69.85,15.37 v66.55,15.37
  Bottom 0.406: R10.2 C24.2
HEAT1  (via drill 0.38)
  Top 0.152: v65.53,23.75 v65.53,20.96 | v66.04,11.81 67.61,11.81 IC2.1 67.68,12.18 68.33,12.83 68.33,13.13 IC2.4 | U3.P$15 47.66,53.3 48.26,52.7 57.4,52.7 57.66,52.45 57.66,44.83 59.44,43.05 61.72,43.05 61.98,42.8 61.98,42.55 62.99,41.53 v63.25,41.53
  Bottom 0.152: v65.53,20.96 65.53,12.32 v66.04,11.81 | v65.53,23.75 65.53,25.4 63.25,27.69 63.25,38.99 62.74,39.5 62.74,41.02 v63.25,41.53
HEAT1_ON  (via drill 0.38)
  Top 0.152: v33.78,24 33.27,24.51 33.27,27.81 22.61,38.48 22.61,39.75 24.38,41.53 v24.38,42.29 | v32.89,41.4 34.04,42.55 34.04,44.29 U3.P$49
  Bottom 0.152: v33.78,24 59.94,24 61.21,22.73 66.71,22.73 R12.2 | v24.38,42.29 25.27,41.4 v32.89,41.4
  Bottom 0.406: R12.2 C19.2
HEAT2  (via drill 0.38)
  Top 0.152: v62.74,26.29 62.74,22.23 65.79,19.18 68.88,19.18 IC3.4 68.95,19.54 69.6,20.19 70.1,20.19 70.23,20.32 70.23,21.08 | U3.P$14 47.4,52.8 48.01,52.2 56.9,52.2 57.15,51.94 57.15,44.58 59.18,42.55 60.58,42.55 v61.98,41.15 | 70.23,21.08 70.23,21.21 | IC3.1 70.25,21.1 70.23,21.08
  Bottom 0.152: 62.99,26.54 v62.74,26.29 62.74,38.73 61.98,39.5 v61.98,41.15
HEAT2_ON  (via drill 0.38)
  Top 0.152: v46.74,59.82 42.67,63.88 41.4,63.88 v40.64,63.12 | v35.81,58.55 35.81,57.79 36.58,57.02 36.58,55.86 U3.P$27 | v46.74,57.53 45.21,56.01 45.21,54.74 45.72,54.23 54.61,54.23 v54.86,53.98 | v55.63,50.16 v55.63,42.29 | v61.72,30.35 v64.01,30.35
  Bottom 0.152: C22.2 66.71,35.52 66.04,36.2 65.28,36.2 | v40.64,63.12 40.39,63.12 v35.81,58.55 | v46.74,59.82 v46.74,57.53 | v54.86,53.98 54.86,50.93 v55.63,50.16 | v61.72,30.35 62.23,30.86 62.23,38.23 59.18,41.27 59.18,41.53 58.42,42.29 v55.63,42.29 | v64.01,30.35 64.77,29.59 66.04,29.59 66.8,30.35 66.8,32.55 R18.2
  Bottom 0.406: R18.2 C22.2
HEAT3  (via drill 0.38)
  Top 0.152: v72.14,48.9 v84.07,48.9 | v107.7,27.81 104.98,27.81 | 104.98,27.81 104.9,27.81 104.39,27.3 104.39,26.8 103.76,26.16 103.76,25.86 IC4.1 | 104.98,27.81 IC4.4 | U3.P$13 47.14,52.3 47.75,51.69 55.63,51.69 v55.88,51.44 | v62.23,60.33 60.96,61.59 59.44,61.59 v56.64,58.8 | v62.99,54.99 66.29,54.99 66.8,54.48 v66.8,48.9 | v56.13,53.98 55.88,54.23 v55.88,56.9 | v93.22,48.9 93.6,48.9 93.85,49.15 v97.03,49.15
  Bottom 0.152: v66.8,48.9 v72.14,48.9 | v107.7,27.81 110.49,30.61 110.49,46.1 107.44,49.15 v97.03,49.15 | v62.23,60.33 62.23,55.75 v62.99,54.99 | v55.88,51.44 55.88,53.72 v56.13,53.98 | v84.07,48.9 84.33,48.9 84.45,49.02 93.09,49.02 v93.22,48.9 | v56.64,58.8 55.88,58.04 v55.88,56.9
HEAT3_ON  (via drill 0.38)
  Top 0.152: v34.04,28.07 22.99,38.61 22.99,39.62 29.72,46.36 32,46.36 32.02,46.34 U3.P$48 | v61.21,28.07 65.53,28.07 66.8,26.8 70.36,26.8 71.12,26.04 71.12,23.5 71.37,23.24 75.69,23.24 76.2,23.75 76.2,24.51 77.22,25.53 78.99,25.53 79.5,26.04 79.5,29.59 v80.77,30.86
  Bottom 0.152: v34.04,28.07 v61.21,28.07 | v80.77,30.86 80.77,33.15 80.94,33.31 81.03,33.31 R25.2 C27.2
MCLRN  (via drill 0.38)
  Top 0.152: R5.2 46.81,43.61 MCLR.TP 43.6,44.41 40.77,47.24 40.77,48.13 | 40.77,48.13 40.89,48.13 42.16,49.4 43.42,49.4 U3.P$7 | X1.1 22.99,55.75 v25.02,53.72 | v28.7,43.31 30.48,43.31 35.31,48.13 40.77,48.13
  Bottom 0.152: v25.02,53.72 25.02,44.2 25.78,43.43 28.58,43.43 v28.7,43.31
N$1  (via drill 0.38)
  Top 0.406: C5.1 108.2,7.24 107.95,7.49 R3.1 107.86,8.93 v106.17,7.24
  Bottom 0.406: v106.17,7.24 105.16,7.24 102.11,4.19 92.96,4.19 91.95,5.21 J4.4
N$2
  Top 0.152: R4.2 32.35,60.87 U18.3
N$3
  Top 0.152: U18.4 34.62,60.05 C9.1
N$4
  Top 0.152: X2.P$3 24.43,47.42 25.65,48.64 26.1,48.64 C3.1 27.99,48.94 29.34,50.29 32.01,50.29 U3.P$40
N$5
  Top 0.152: C10.+ 37.99,37.57 C11.1 37.93,37.89 37.34,38.48 37.34,43.31 37.59,43.56 37.59,44.23 U3.P$56
N$6  (1 unrouted)
  Top 0.152: C2.1 26.34,50.74 | 26.34,50.74 26.92,50.16 28.7,50.16 29.34,50.8 32,50.8 | X2.P$1 25.71,50.22 26.29,50.8 | 26.29,50.8 26.42,50.93 | 26.34,50.74 26.29,50.8
N$7  (via drill 0.38)
  Top 0.406: R8.2 v70.61,11.56 69.3,11.56 IC2.3
  Bottom 0.406: J16.3 80.77,6.48 77.72,3.68 71.63,3.68 70.61,4.7 v70.61,11.56
N$8
  Top 0.152: C13.1 67.68,14.63 IC2.5 65.47,13.78 64.77,13.08 64.77,11.39 R7.1
N$9
  Top 0.406: J16.4 76.2,8.51 75.44,7.75 70.45,7.75 R9.1 C18.1
N$10  (via drill 0.38)
  Top 0.406: R2.2 v110.24,11.81 108.39,13.66 IC1.3
  Bottom 0.406: J4.3 94.49,10.8 95,11.3 103.12,11.3 104.39,12.57 109.47,12.57 v110.24,11.81
N$11  (via drill 0.38)
  Top 0.406: v72.39,16.13 72.71,15.81 Q6.1 72.3,11.57 R11.1
  Bottom 0.406: Q7.1 72.39,14.8 v72.39,16.13 71.37,17.14 Q8.3
N$12
  Bottom 0.406: 68.83,22.48 70.1,22.48 70.36,22.23 70.36,22.16 Q8.1 | R12.1 68.83,22.48 | 68.83,22.48 68.83,24.09 C19.1
N$13  (via drill 0.38)  (1 unrouted)
  Top 0.406: Q3.1 88.2,16.07 v88.01,16.38 | R1.1 v85.85,12.32
  Bottom 0.406: 88.39,14.62 Q2.1 | Q4.3 85.6,17.02 | 85.6,17.02 87.76,17.02 87.88,17.02 88.01,16.89 v88.01,16.38 88.14,16.26 88.14,14.86 88.39,14.61 | v85.85,12.32 85.85,16.76 85.6,17.02
N$14
  Bottom 0.406: C24.1 81.62,19.01 81.79,19.18 | 81.79,19.18 83.76,19.18 Q4.1 | 81.79,19.18 R10.1
N$15  (via drill 0.38)
  Top 0.406: Q9.4 77.78,11.61 77.72,11.56 77.47,11.81 76.71,11.81 76.54,11.98 Q6.2 74.61,16.06 v74.68,16.13
  Bottom 0.406: v74.68,16.13 74.68,14.54 Q7.2
N$16  (via drill 0.38)
  Top 0.406: Q5.4 Q3.2 90.11,16.19 v90.3,16.38
  Bottom 0.406: v90.3,16.38 90.17,16.26 90.17,14.5 Q2.2
N$17  (via drill 0.38)
  Top 0.152: J2.3 81.03,20.45 79.5,18.92 R14.2 77.47,18.92 77.72,18.67 v77.72,17.65 | IC3.3 69.09,21.29 69.09,21.72 69.34,21.97 70.87,21.97 71.12,21.72 71.12,20.7 v72.64,19.18
  Bottom 0.152: v72.64,19.18 76.07,19.18 v77.72,17.65
N$18  (via drill 0.38)
  Top 0.152: v64.26,25.53 65.02,26.29 65.66,26.29 66.29,25.65 66.29,24 66.55,23.75 67.22,23.75 R13.1 v67.31,20.45 | v67.82,18.16 69.16,18.16 IC3.5
  Bottom 0.152: C20.1 64.1,25.44 v64.26,25.53 | v67.31,20.45 67.31,18.67 v67.82,18.16
N$19
  Top 0.406: J2.4 77.98,22.48 72.64,22.48 72.3,22.14 C21.1 72.3,22.31 71.54,22.31 71.37,22.48 70.36,22.48 69.09,23.75 R15.1
N$20  (via drill 0.38)
  Top 0.406: v72.14,30.61 72.2,30.54 Q11.1 72.2,24.57 71.88,24.26 R16.1
  Bottom 0.406: Q10.1 72.14,28.98 v72.14,30.61 72.14,30.86 71.63,31.37 Q12.3
N$21  (via drill 0.38)
  Top 0.406: C6.1 v103.12,15.24 103.12,13.08 104.65,11.56 v104.9,11.56 | v105.92,16.64 105.92,15.67 IC1.5 | R17.1 103.72,8.93 v103.12,9.52
  Bottom 0.406: v103.12,15.24 104.52,15.24 v105.92,16.64 | v103.12,9.52 103.12,9.78 v104.9,11.56
N$22
  Bottom 0.406: R18.1 68.41,34.51 68.58,34.67 | 68.58,34.67 70.55,34.67 Q12.1 | C22.1 68.58,34.67
N$23  (via drill 0.38)
  Top 0.406: v74.17,30.48 74.1,30.42 Q11.2 Q13.4
  Bottom 0.406: v74.17,30.48 74.17,28.85 | 74.17,28.83 74.17,28.85 | 74.17,28.85 Q10.2
N$24  (via drill 0.38)
  Top 0.406: J3.3 93.98,20.7 94.49,20.19 94.49,18.92 v93.73,18.16 | R22.2 v108.46,25.02 108.46,25.27 107.95,25.78 105.11,25.78 IC4.3
  Bottom 0.406: v93.73,18.16 106.43,18.16 108.46,20.19 v108.46,25.02
N$25  (via drill 0.38)
  Top 0.406: C25.1 R21.1 v104.39,20.45 | v103.89,28.83 103.89,27.89 IC4.5
  Bottom 0.406: v104.39,20.45 104.39,28.32 v103.89,28.83
N$26  (1 unrouted)
  Top 0.406: J3.4 91.44,25.02 91.95,25.53 97.79,25.53 98.3,26.04 98.3,27.3 98.89,27.9 99.82,27.9 R23.1 | C26.1 99.82,28.57 100.08,28.32 100.08,28.07
N$27  (via drill 0.38)  (1 unrouted)
  Top 0.406: Q15.1 87.12,26.92 v87.12,30.61 | R24.1 86.02,27.65 86.61,27.05 86.87,27.05 87.12,26.8
  Bottom 0.406: Q14.1 87.19,30.61 v87.12,30.61 86.36,31.37 86.36,32 Q16.3
N$28  (1 unrouted)
  Bottom 0.152: C27.1 83.57,35.43 84.58,34.42 85.03,34.42 Q16.1
N$29  (via drill 0.38)
  Top 0.406: Q15.2 89.15,26.92 | 89.15,26.92 v89.15,30.86 | 89.15,26.92 89.54,26.92 89.92,26.54 90.93,26.54 91.19,26.29 91.19,26.37 Q17.4
  Bottom 0.406: v89.15,30.86 89.15,29.1 | 89.15,29.08 89.15,29.1 | 89.15,29.1 Q14.2
N$32  (via drill 0.38)
  Top 0.152: Q1.3 34.54,30.1 36.07,28.57 | 36.07,28.57 36.32,28.83 39.12,28.83 v39.62,29.34 | v47.75,29.34 47.75,19.62 J1.16 | R20.1 36.07,28.57
  Bottom 0.152: v39.62,29.34 v47.75,29.34
PGC  (via drill 0.38)
  Top 0.152: U3.P$17 41.52,53.71 40.89,52.96 v40.89,51.69 | v31.5,42.93 31.5,38.48 v30.86,37.85
  Bottom 0.152: v40.89,51.69 39.5,50.42 38.73,50.42 38.48,50.16 31.5,50.16 30.1,48.77 30.1,45.59 30.73,44.96 33.78,44.96 34.42,44.32 34.42,43.31 34.04,42.93 v31.5,42.93 | v30.86,37.85 20.07,37.85 18.8,39.12 18.8,63.88 16.76,65.91 X1.5
PGD  (via drill 0.38)  (1 unrouted)
  Top 0.152: v29.72,58.55 29.59,58.55 26.29,61.59 18.54,61.59 17.02,63.37 X1.4 | v42.16,57.15 41.4,57.15 41.02,56.77 41.02,55.88
  Bottom 0.152: v42.16,57.15 36.7,57.15 34.29,54.74 31.5,54.74 30.73,55.5 30.73,57.53 v29.72,58.55
PS_ON
  Top 0.152: Q1.1 35.5,39.69 36.07,40.26 36.07,44.32 36.05,44.3 U3.P$53
SERVO0  (via drill 0.38)
  Top 0.152: U3.P$60 39.52,42.14 42.42,39.24 56.39,39.24 v57.15,38.48 | v61.47,31.88 68.07,31.88 v68.83,31.12 | v79.76,36.58 79.76,43.56 J6.8 | v76.33,33.66 76.71,33.66 77.22,34.16 77.22,35.05 v77.6,35.43
  Bottom 0.152: v57.15,38.48 60.96,38.48 61.47,37.97 v61.47,31.88 | v68.83,31.12 71.12,33.4 74.17,33.4 74.93,32.64 74.93,32.13 74.68,31.88 74.68,31.37 75.44,30.61 75.95,30.61 76.33,30.99 v76.33,33.66 | v77.6,35.43 78.61,35.43 v79.76,36.58
SERVO1  (via drill 0.38)
  Top 0.152: U3.P$58 38.52,45.25 39.12,45.85 41.4,45.85 43.43,43.81 44.7,43.81 v45.47,43.05
  Bottom 0.152: v45.47,43.05 48.26,43.05 49.02,43.81 61.47,43.81 61.72,43.56 63.5,43.56 63.75,43.81 66.8,43.81 J7.8
SERVO2  (via drill 0.38)
  Top 0.152: U3.P$21 39.52,56.92 41.15,58.55 44.2,58.55 44.7,59.05 45.09,59.05 45.85,58.29 47.5,58.29 48.51,59.31 49.02,59.31 51.05,61.34 52.32,61.34 55.12,64.13 62.74,64.13 v63.5,63.37 | v79.25,59.56 79.25,61.34 79.76,61.85 85.85,61.85 v86.36,62.36 | v85.09,63.88 84.84,63.88 83.57,65.15 83.57,73.03 83.31,73.28 J8.8
  Bottom 0.152: v63.5,63.37 63.5,61.59 65.02,60.07 78.74,60.07 v79.25,59.56 | v86.36,62.36 86.36,63.37 85.85,63.88 v85.09,63.88
SERVO3  (via drill 0.38)
  Top 0.152: U3.P$23 38.52,57.11 37.85,57.79 37.85,58.29 38.35,58.8 40.89,58.8 41.15,59.05 44.2,59.05 44.58,59.44 45.21,59.44 45.85,58.8 47.5,58.8 50.8,62.1 52.07,62.1 53.34,63.37 v53.34,63.88
  Bottom 0.152: v53.34,63.88 53.34,65.91 53.85,66.42 55.37,66.42 57.66,68.71 57.66,73.66 61.21,77.09 66.55,77.09 66.8,76.84 66.8,74.55 J9.8
SERVO4  (via drill 0.38)
  Top 0.152: U3.P$12 42.43,51.8 v42.04,52.2 | v59.94,74.55 v70.61,74.55 | v81.79,74.55 86.87,74.55 J12.8
  Bottom 0.152: v42.04,52.2 49.66,52.2 50.04,52.58 50.04,60.07 52.7,62.74 53.47,62.74 54.36,63.63 54.36,64.26 53.85,64.77 53.85,65.66 54.1,65.91 55.37,65.91 58.04,68.58 58.04,72.77 v59.94,74.55 | v70.61,74.55 v81.79,74.55
SERVO5  (via drill 0.38)
  Top 0.152: 68.07,34.42 69.34,33.15 75.44,33.15 75.69,32.89 88.14,32.89 v88.39,32.64 | v100.08,33.91 v103.12,33.91 | v101.85,36.96 101.85,41.78 J13.8 | U3.P$11 41.65,51.3 v40.51,50.29 | v60.45,34.93 63.75,34.93 64.26,34.42 68.07,34.42 | 67.98,34.51 68.07,34.42 | v44.96,34.93 v53.09,34.93 | v56.13,34.93 57.02,34.93 v58.29,33.66
  Bottom 0.152: v88.39,32.64 89.66,32.64 91.44,34.42 99.57,34.42 v100.08,33.91 | v103.12,33.91 103.12,35.69 v101.85,36.96 | v40.51,50.29 40.13,49.91 40.13,47.37 44.45,43.05 44.45,35.43 v44.96,34.93 | v53.09,34.93 v56.13,34.93 | v58.29,33.66 59.18,33.66 v60.45,34.93
SERVO6  (via drill 0.38)
  Top 0.152: v64.77,63.88 64.01,64.64 v49.02,64.64 50.29,63.37 v52.07,63.37 | v97.79,61.34 100.08,63.63 100.08,71.5 J14.8 | U3.P$55 37.02,38.16 36.58,37.72 36.58,34.67 37.59,33.66 v52.07,33.66 | v52.07,42.04 52.07,42.93 53.47,44.32 53.47,49.66 v53.34,49.78 | v53.34,58.29 50.04,58.29 v49.28,57.53
  Bottom 0.152: v64.77,63.88 64.77,62.87 67.06,60.58 97.03,60.58 v97.79,61.34 | v49.28,57.53 49.28,60.58 v52.07,63.37 | v52.07,33.66 v52.07,42.04 | v53.34,49.78 v53.34,58.29
SERVO7  (via drill 0.38)
  Top 0.152: J15.8 88.39,45.85 87.63,46.61 83.06,46.61 v82.3,47.37 | v81.79,51.18 79.76,51.18 79.5,51.44 79.5,53.72 75.69,57.53 63.75,57.53 v60.71,54.48 | v56.9,54.86 58.67,53.09 58.67,47.88 58.93,47.62 59.69,47.62 60.71,48.64 v60.71,50.67 | v54.99,55.37 49.53,55.37 v48.64,55.88 | v38.99,58.04 38.99,55.84 U3.P$22
  Bottom 0.152: v82.3,47.37 82.3,50.67 v81.79,51.18 | v56.9,54.86 55.5,54.86 v54.99,55.37 | v48.64,55.88 44.7,55.88 42.42,58.04 v38.99,58.04 | v60.71,50.67 v60.71,54.48
U1CTS  (via drill 0.38)
  Top 0.152: J10.CTS 33.62,69.14 R19.R4A 29.73,68.45 v30.1,68.45 | U3.P$46 28.26,47.3 v28.19,47.37
  Bottom 0.152: v30.1,68.45 30.1,67.31 26.16,63.37 26.16,49.15 27.94,47.37 v28.19,47.37
U1RTS  (via drill 0.38)
  Top 0.152: R19.R1A 22.43,69.14 J10.RTS | v34.54,39.75 35.56,40.77 35.56,44.27 U3.P$52 | v24.38,39.75 v29.59,39.75
  Bottom 0.152: J10.RTS 21.08,70.49 21.08,68.45 22.61,66.93 22.61,41.53 v24.38,39.75 | v29.59,39.75 v34.54,39.75
U1RX  (via drill 0.38)  (1 unrouted)
  Top 0.152: R19.R2A 27.34,69.56 26.92,69.98 24.14,69.98 J10.RX | U3.P$50 34.52,45.57 34.54,45.59 34.29,45.85 33.78,45.85 33.27,45.34 33.27,44.07 v33.02,43.81 | v28.96,64.13 28.96,65.91 v28.19,66.67
  Bottom 0.152: v33.02,43.81 30.23,43.81 29.72,44.32 29.72,57.28 28.45,58.55 28.45,63.63 v28.96,64.13 | v28.19,66.67 27.43,66.67 23.11,70.99
U1TX  (via drill 0.38)  (1 unrouted)
  Top 0.152: R19.R3A 28.14,69.42 28.7,69.98 31.91,69.98 J10.TX | v23.11,67.69 23.11,67.95 23.62,68.45 27.94,68.45 28.07,68.58 28.07,68.96 28.19,69.09 | 35.05,43.57 U3.P$51 35.05,44.27 35.05,42.04 34.8,41.78 v34.8,41.53
  Bottom 0.152: v23.11,67.69 22.99,67.56 22.99,41.66 24.13,40.51 33.66,40.51 v34.8,41.53
USBID  (via drill 0.38)
  Top 0.152: U25.4 51.56,69.97 51.05,69.47 50.29,69.47 v47.5,66.67 | R6.2 30.1,54.86 31.24,53.72 31.94,53.72 U3.P$33 32,53.82 v32,55.75
  Bottom 0.152: v47.5,66.67 47.5,66.17 45.21,63.88 42.67,63.88 35.81,57.02 33.27,57.02 v32,55.75
VBUS
  Top 0.152: D1.A 54.59,72.03 54.1,72.52 54.1,76.97 U25.1

## Text on the board
tValues: WASP Connector | Power 6.6 to 12v
200bmp: /home/acamilo/Downloads/logo_blurb.bmp